# Altium PCB GC-Pcb.PcbDoc (part 3 of 3)
Units mm, origin at the board's own origin, x right, y up, seen from the top; angles counter-clockwise.
Board outline 75 x 40 mm, 4 copper layers (Top Copper, GND, PWR, Bottom Copper), stack 1.312 mm thick; 83 components, 62 nets, 306 pads, 137 vias.
Unrouted connection lines stored in the file: 2.
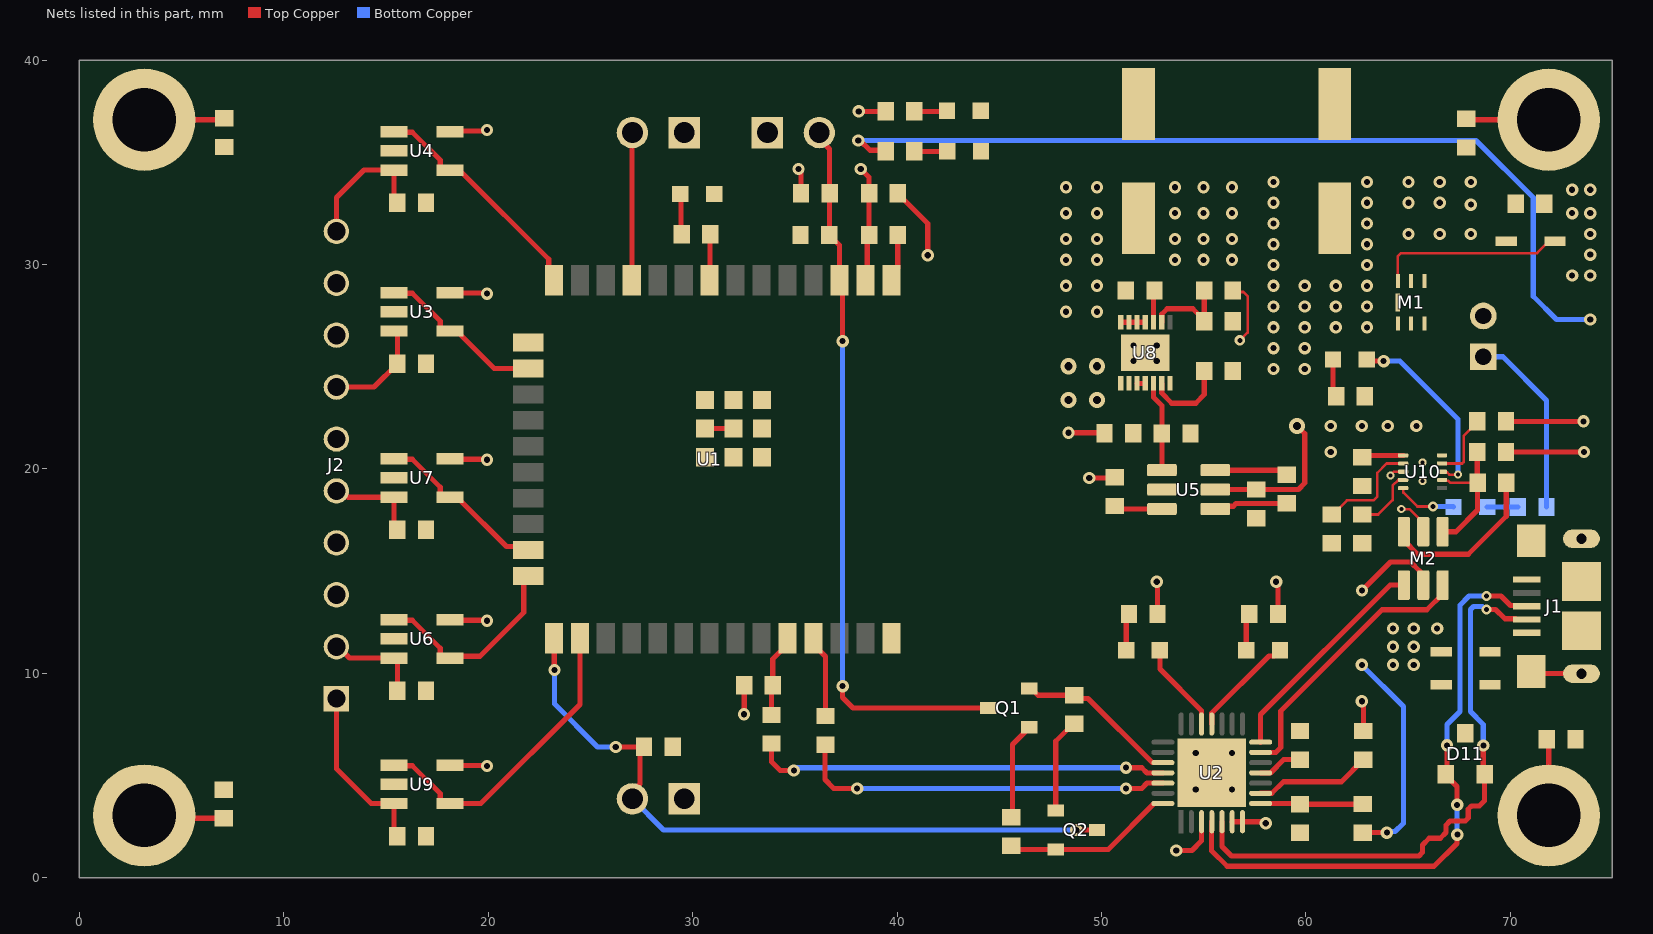
[diagram p4: the nets of this part, all layers, seen from the top]

## Part data (continued)
R10 R15 R16 R32: library part R-RC0603FR-071KL, "Fixed Resistor, Metal Glaze/thick Film, 0.1W, 1000ohm, 75V, 1% +/-Tol, 100ppm/Cel, Surface Mount, 0603", Manufacturer=Yageo, Max Operating Temperature=155°C, Min Operating Temperature=-55°C, Package Height=0.45mm, Package Length=1.6mm, Package Shape=Rectangular, Package Style=SMTMeter, Package Width=0.8mm, Rated Power Dissipation (P)=100mW, Rated Temperature=70°C, Resistance=1kR, Resistor Type="FIXED RESISTOR", Supplier Part Number 1=4016291, Temperature Coefficient=100ppm/°C, Tolerance=1%, Working Voltage=75V, Additional Feature="LASER TRIMMABLE", Category="Chip SMD Resistors", ComponentLink1description=https://datasheet.ciiva.com:443/pdfs/VipMasterIC/IC/YAGO/YAGO-S-A0008145938/YAGO-S-A0008145938-1.pdf?src-supplier=IHS+Markit, ComponentLink1URL=https://datasheet.ciiva.com:443/pdfs/VipMasterIC/IC/YAGO/YAGO-S-A0008145938/YAGO-S-A0008145938-1.pdf?src-supplier=IHS+Markit, ComponentLink2description=https://datasheet.ciiva.com/11808/0900766b80f96399-11808081.pdf?src-supplier=Rs, ComponentLink2URL=https://datasheet.ciiva.com/11808/0900766b80f96399-11808081.pdf?src-supplier=Rs, ComponentLink3Description=https://datasheet.ciiva.com/7746/1686128-7746280.pdf?src-supplier=Element14, ComponentLink3URL=https://datasheet.ciiva.com/7746/1686128-7746280.pdf?src-supplier=Element14, ComponentLink4Description=https://datasheet.ciiva.com/7660/1868787-7660790.pdf?src-supplier=Element14, ComponentLink4URL=https://datasheet.ciiva.com/7660/1868787-7660790.pdf?src-supplier=Element14, ComponentLink5Description=https://datasheet.ciiva.com/7983/443971-7983613.pdf?src-supplier=Element14, ComponentLink5URL=https://datasheet.ciiva.com/7983/443971-7983613.pdf?src-supplier=Element14, ComponentLink6Description=https://datasheet.ciiva.com/7746/1738695-7746281.pdf?src-supplier=Element14, ComponentLink6URL=https://datasheet.ciiva.com/7746/1738695-7746281.pdf?src-supplier=Element14, ComponentLink7Description=https://datasheet.ciiva.com/7746/1738695-7746279.pdf?src-supplier=Element14, ComponentLink7URL=https://datasheet.ciiva.com/7746/1738695-7746279.pdf?src-supplier=Element14, ComponentLink8Description=https://datasheet.ciiva.com/8896/pyu-rc0603-51-rohs-l-4-8896106.pdf?src-supplier=Avnet, ComponentLink8URL=https://datasheet.ciiva.com/8896/pyu-rc0603-51-rohs-l-4-8896106.pdf?src-supplier=Avnet, ComponentLink9Description=https://datasheet.ciiva.com/15189/getdatasheetpartid-404327-15189644.pdf?src-supplier=Verical, ComponentLink9URL=https://datasheet.ciiva.com/15189/getdatasheetpartid-404327-15189644.pdf?src-supplier=Verical, Construction=Chip, JESD-609 Code=e3, Manufacturer Part Number=RC0603FR-071KL, Mount="Surface Mount", Number of Pins=2, Packaging="Tape and Reel", Pricing="5000=0.0015, 75000=0.0015, 250000=0.0014, 750000=0.0013, 2500000=0.0012 (USD)", Reach SVHC Compliant=Yes, RoHS=Yes, RoHS Compliant=Yes, Size Code=0603, Stock=4965000, Supplier 1="Future Electronics", Technology="METAL GLAZE/THICK FILM", Terminal Finish=Nickel, Termination=Wraparound
R19 R20 R22 R23 R26 R28: library part R-RC0603FR-07100KL, "Fixed Resistor, Metal Glaze/thick Film, 0.1W, 100000ohm, 75V, 1% +/-Tol, 100ppm/Cel, Surface Mount, 0603", Manufacturer=Yageo, Max Operating Temperature=155°C, Min Operating Temperature=-55°C, Package Height=0.45mm, Package Length=1.6mm, Package Shape=Rectangular, Package Style=SMTMeter, Package Width=0.8mm, Rated Power Dissipation (P)=100mW, Rated Temperature=70°C, Resistance=100kR, Resistor Type="FIXED RESISTOR", Supplier Part Number 1=3697448, Temperature Coefficient=100ppm/°C, Tolerance=1%, Working Voltage=75V, Additional Feature="LASER TRIMMABLE", Category="Chip SMD Resistors", ComponentLink1description=https://datasheet.ciiva.com:443/pdfs/VipMasterIC/IC/YAGO/YAGO-S-A0008145938/YAGO-S-A0008145938-1.pdf?src-supplier=IHS+Markit, ComponentLink1URL=https://datasheet.ciiva.com:443/pdfs/VipMasterIC/IC/YAGO/YAGO-S-A0008145938/YAGO-S-A0008145938-1.pdf?src-supplier=IHS+Markit, ComponentLink2description=https://datasheet.ciiva.com/11808/0900766b80f96399-11808107.pdf?src-supplier=Rs, ComponentLink2URL=https://datasheet.ciiva.com/11808/0900766b80f96399-11808107.pdf?src-supplier=Rs, ComponentLink3Description=https://datasheet.ciiva.com/7983/443971-7983593.pdf?src-supplier=Element14, ComponentLink3URL=https://datasheet.ciiva.com/7983/443971-7983593.pdf?src-supplier=Element14, ComponentLink4Description=https://datasheet.ciiva.com/22747/443971-22747516.pdf?src-supplier=Element14, ComponentLink4URL=https://datasheet.ciiva.com/22747/443971-22747516.pdf?src-supplier=Element14, ComponentLink5Description=https://datasheet.ciiva.com/46440/1868787-46440889.pdf?src-supplier=Element14, ComponentLink5URL=https://datasheet.ciiva.com/46440/1868787-46440889.pdf?src-supplier=Element14, ComponentLink6Description=https://datasheet.ciiva.com/7746/1738695-7746235.pdf?src-supplier=Element14, ComponentLink6URL=https://datasheet.ciiva.com/7746/1738695-7746235.pdf?src-supplier=Element14, ComponentLink7Description=https://datasheet.ciiva.com/7746/1738695-7746234.pdf?src-supplier=Element14, ComponentLink7URL=https://datasheet.ciiva.com/7746/1738695-7746234.pdf?src-supplier=Element14, Construction=Chip, JESD-609 Code=e3, Manufacturer Part Number=RC0603FR-07100KL, Mount="Surface Mount", Number of Pins=2, Packaging="Tape and Reel", Pricing="5000=0.0015, 75000=0.0015, 250000=0.0014, 750000=0.0013, 2500000=0.0012 (USD)", Reach SVHC Compliant=Yes, RoHS=Yes, RoHS Compliant=Yes, Size Code=0603, Stock=10630000, Supplier 1="Future Electronics", Technology="METAL GLAZE/THICK FILM", Terminal Finish=Nickel, Termination=Wraparound
R25 R31: library part R-ERA-3AEB683V, "Fixed Resistor, Thin Film, 0.1W, 68000ohm, 75V, 0.1% +/-Tol, 25ppm/Cel, Surface Mount, 0603", Manufacturer=Panasonic, Max Operating Temperature=155°C, Min Operating Temperature=-55°C, Package Height=0.45mm, Package Length=1.6mm, Package Style=SMTMeter, Package Width=0.8mm, Rated Power Dissipation (P)=100mW, Rated Temperature=85°C, Resistance=68kR, Resistor Type="FIXED RESISTOR", Supplier Part Number 1=667-ERA-3AEB683V, Temperature Coefficient=25ppm/°C, Tolerance=0.1%, Working Voltage=75V, Category="Chip SMD Resistors", ComponentLink1description=https://datasheet.ciiva.com:443/pdfs/VipMasterIC/IC/PANA/PANA-S-A0009459258/PANA-S-A0009459258-1.pdf?src-supplier=IHS+Markit, ComponentLink1URL=https://datasheet.ciiva.com:443/pdfs/VipMasterIC/IC/PANA/PANA-S-A0009459258/PANA-S-A0009459258-1.pdf?src-supplier=IHS+Markit, ComponentLink2description=https://datasheet.ciiva.com/11808/0900766b80fe20f7-11808073.pdf?src-supplier=Rs, ComponentLink2URL=https://datasheet.ciiva.com/11808/0900766b80fe20f7-11808073.pdf?src-supplier=Rs, ComponentLink3Description=https://datasheet.ciiva.com/29183/451591-da-01-en-widerstand-0603-era-29183858.pdf?src-supplier=Conrad, ComponentLink3URL=https://datasheet.ciiva.com/29183/451591-da-01-en-widerstand-0603-era-29183858.pdf?src-supplier=Conrad, ComponentLink4Description=https://datasheet.ciiva.com/43455/485442-43455241.pdf?src-supplier=Farnell, ComponentLink4URL=https://datasheet.ciiva.com/43455/485442-43455241.pdf?src-supplier=Farnell, ComponentLink5Description=https://datasheet.ciiva.com/46443/485442-46443725.pdf?src-supplier=Element14, ComponentLink5URL=https://datasheet.ciiva.com/46443/485442-46443725.pdf?src-supplier=Element14, ComponentLink6Description=https://datasheet.ciiva.com/6138/485442-6138684.pdf?src-supplier=Farnell, ComponentLink6URL=https://datasheet.ciiva.com/6138/485442-6138684.pdf?src-supplier=Farnell, ComponentLink7Description=https://datasheet.ciiva.com/46443/485442-46443726.pdf?src-supplier=Element14, ComponentLink7URL=https://datasheet.ciiva.com/46443/485442-46443726.pdf?src-supplier=Element14, ComponentLink8Description=https://datasheet.ciiva.com/48530/era-eng-tds-48530367.pdf?src-supplier=Distrelec, ComponentLink8URL=https://datasheet.ciiva.com/48530/era-eng-tds-48530367.pdf?src-supplier=Distrelec, ComponentLink9Description=https://datasheet.ciiva.com/48425/era-eng-tds-48425487.pdf?src-supplier=Distrelec, ComponentLink9URL=https://datasheet.ciiva.com/48425/era-eng-tds-48425487.pdf?src-supplier=Distrelec, ComponentLink10Description=https://datasheet.ciiva.com/7886/485442-7886603.pdf?src-supplier=Element14, ComponentLink10URL=https://datasheet.ciiva.com/7886/485442-7886603.pdf?src-supplier=Element14, ComponentLink11Description=https://datasheet.ciiva.com/6138/485442-6138681.pdf?src-supplier=Farnell, ComponentLink11URL=https://datasheet.ciiva.com/6138/485442-6138681.pdf?src-supplier=Farnell, ComponentLink12Description=https://datasheet.ciiva.com/22739/485442-22739292.pdf?src-supplier=Element14, ComponentLink12URL=https://datasheet.ciiva.com/22739/485442-22739292.pdf?src-supplier=Element14, ComponentLink13Description=https://datasheet.ciiva.com/16770/70068849-16770412.pdf?src-supplier=Allied+Electronics, ComponentLink13URL=https://datasheet.ciiva.com/16770/70068849-16770412.pdf?src-supplier=Allied+Electronics, ComponentLink14Description=https://datasheet.ciiva.com/9117/aoa0000ce26-9117752.pdf?src-supplier=Avnet, ComponentLink14URL=https://datasheet.ciiva.com/9117/aoa0000ce26-9117752.pdf?src-supplier=Avnet, Construction=Rectangular, JESD-609 Code=e3, Manufacturer Part Number=ERA-3AEB683V, Mount="Surface Mount", Number of Pins=2, Packaging="Tape and Reel", Pricing="1=0.32, 10=0.139, 50=0.139, 100=0.062, 1000=0.043, 10000=0.034 (USD)", Reach SVHC Compliant=Yes, Reference Standard=AEC-Q200, RoHS=Yes, RoHS Compliant=Yes, Size Code=0603, Stock=13636, Supplier 1=Mouser, Technology="THIN FILM", Terminal Finish=Nickel, Termination=Wraparound
R27 R33: library part R-ERA-3AEB153V, "Fixed Resistor, Thin Film, 0.1W, 15000ohm, 75V, 0.1% +/-Tol, 25ppm/Cel, Surface Mount, 0603", Manufacturer=Panasonic, Max Operating Temperature=155°C, Min Operating Temperature=-55°C, Package Height=0.45mm, Package Length=1.6mm, Package Style=SMTMeter, Package Width=0.8mm, Rated Power Dissipation (P)=100mW, Rated Temperature=85°C, Resistance=15kR, Resistor Type="FIXED RESISTOR", Supplier Part Number 1=667-ERA-3AEB153V, Temperature Coefficient=25ppm/°C, Tolerance=0.1%, Working Voltage=75V, Category="Chip SMD Resistors", ComponentLink1description=https://datasheet.ciiva.com:443/pdfs/VipMasterIC/IC/PANA/PANA-S-A0009459258/PANA-S-A0009459258-1.pdf?src-supplier=IHS+Markit, ComponentLink1URL=https://datasheet.ciiva.com:443/pdfs/VipMasterIC/IC/PANA/PANA-S-A0009459258/PANA-S-A0009459258-1.pdf?src-supplier=IHS+Markit, ComponentLink2description=https://datasheet.ciiva.com/11808/0900766b80fe20f7-11808023.pdf?src-supplier=Rs, ComponentLink2URL=https://datasheet.ciiva.com/11808/0900766b80fe20f7-11808023.pdf?src-supplier=Rs, ComponentLink3Description=https://datasheet.ciiva.com/29183/451305-da-01-en-widerstand-0603-era-29183818.pdf?src-supplier=Conrad, ComponentLink3URL=https://datasheet.ciiva.com/29183/451305-da-01-en-widerstand-0603-era-29183818.pdf?src-supplier=Conrad, ComponentLink4Description=https://datasheet.ciiva.com/46422/485442-46422566.pdf?src-supplier=Element14, ComponentLink4URL=https://datasheet.ciiva.com/46422/485442-46422566.pdf?src-supplier=Element14, ComponentLink5Description=https://datasheet.ciiva.com/6000/485442-6000508.pdf?src-supplier=Farnell, ComponentLink5URL=https://datasheet.ciiva.com/6000/485442-6000508.pdf?src-supplier=Farnell, ComponentLink6Description=https://datasheet.ciiva.com/46422/485442-46422567.pdf?src-supplier=Element14, ComponentLink6URL=https://datasheet.ciiva.com/46422/485442-46422567.pdf?src-supplier=Element14, ComponentLink7Description=https://datasheet.ciiva.com/5734/485442-5734541.pdf?src-supplier=Farnell, ComponentLink7URL=https://datasheet.ciiva.com/5734/485442-5734541.pdf?src-supplier=Farnell, ComponentLink8Description=https://datasheet.ciiva.com/28681/485442-28681528.pdf?src-supplier=Element14, ComponentLink8URL=https://datasheet.ciiva.com/28681/485442-28681528.pdf?src-supplier=Element14, ComponentLink9Description=https://datasheet.ciiva.com/16764/70068849-16764126.pdf?src-supplier=Allied+Electronics, ComponentLink9URL=https://datasheet.ciiva.com/16764/70068849-16764126.pdf?src-supplier=Allied+Electronics, ComponentLink10Description=https://datasheet.ciiva.com/9193/aoa0000ce26-9193070.pdf?src-supplier=Avnet, ComponentLink10URL=https://datasheet.ciiva.com/9193/aoa0000ce26-9193070.pdf?src-supplier=Avnet, Construction=Rectangular, JESD-609 Code=e3, Manufacturer Part Number=ERA-3AEB153V, Mount="Surface Mount", Number of Pins=2, Packaging="Tape and Reel", Pricing="1=0.31, 10=0.139, 50=0.139, 100=0.062, 1000=0.043, 10000=0.038 (USD)", Reach SVHC Compliant=Yes, Reference Standard=AEC-Q200, RoHS=Yes, RoHS Compliant=Yes, Size Code=0603, Stock=131542, Supplier 1=Mouser, Technology="THIN FILM", Terminal Finish=Nickel, Termination=Wraparound
R30: library part R-ERJ-3EKF5600V, "Fixed Resistor, Metal Glaze/thick Film, 0.1W, 560ohm, 75V, 1% +/-Tol, 100ppm/Cel, Surface Mount, 0603", Manufacturer=Panasonic, Max Operating Temperature=155°C, Min Operating Temperature=-55°C, Package Height=0.45mm, Package Length=1.6mm, Package Shape=Rectangular, Package Style=SMTMeter, Package Width=0.8mm, Rated Power Dissipation (P)=100mW, Rated Temperature=70°C, Resistance=560R, Resistor Type="FIXED RESISTOR", Supplier Part Number 1=667-ERJ-3EKF5600V, Temperature Coefficient=100ppm/°C, Tolerance=1%, Working Voltage=75V, Category="Chip SMD Resistors", ComponentLink1description=https://datasheet.ciiva.com:443/pdfs/VipMasterIC/IC/PANA/PANA-S-A0009889626/PANA-S-A0009889626-1.pdf?src-supplier=IHS+Markit, ComponentLink1URL=https://datasheet.ciiva.com:443/pdfs/VipMasterIC/IC/PANA/PANA-S-A0009889626/PANA-S-A0009889626-1.pdf?src-supplier=IHS+Markit, ComponentLink2description=https://datasheet.ciiva.com/3883/3984280s8821682n1386-3883650.pdf?src-supplier=Arrow+Electronics, ComponentLink2URL=https://datasheet.ciiva.com/3883/3984280s8821682n1386-3883650.pdf?src-supplier=Arrow+Electronics, ComponentLink3Description=https://datasheet.ciiva.com/5860/aoa0000ce2-5860665.pdf?src-supplier=Farnell, ComponentLink3URL=https://datasheet.ciiva.com/5860/aoa0000ce2-5860665.pdf?src-supplier=Farnell, ComponentLink4Description=https://datasheet.ciiva.com/7909/aoa0000ce2-7909198.pdf?src-supplier=Element14, ComponentLink4URL=https://datasheet.ciiva.com/7909/aoa0000ce2-7909198.pdf?src-supplier=Element14, ComponentLink5Description=https://datasheet.ciiva.com/46381/1678782-46381547.pdf?src-supplier=Element14, ComponentLink5URL=https://datasheet.ciiva.com/46381/1678782-46381547.pdf?src-supplier=Element14, ComponentLink6Description=https://datasheet.ciiva.com/22674/1678782-22674427.pdf?src-supplier=Element14, ComponentLink6URL=https://datasheet.ciiva.com/22674/1678782-22674427.pdf?src-supplier=Element14, ComponentLink7Description=https://datasheet.ciiva.com/22737/426256-22737578.pdf?src-supplier=Element14, ComponentLink7URL=https://datasheet.ciiva.com/22737/426256-22737578.pdf?src-supplier=Element14, ComponentLink8Description=https://datasheet.ciiva.com/28590/1678782-28590766.pdf?src-supplier=Element14, ComponentLink8URL=https://datasheet.ciiva.com/28590/1678782-28590766.pdf?src-supplier=Element14, ComponentLink9Description=https://datasheet.ciiva.com/46381/1678782-46381548.pdf?src-supplier=Element14, ComponentLink9URL=https://datasheet.ciiva.com/46381/1678782-46381548.pdf?src-supplier=Element14, ComponentLink10Description=https://datasheet.ciiva.com/24124/aoa0000ce2-24124277.pdf?src-supplier=Mouser, ComponentLink10URL=https://datasheet.ciiva.com/24124/aoa0000ce2-24124277.pdf?src-supplier=Mouser, ComponentLink11Description=https://datasheet.ciiva.com/16763/70260748-16763150.pdf?src-supplier=Allied+Electronics, ComponentLink11URL=https://datasheet.ciiva.com/16763/70260748-16763150.pdf?src-supplier=Allied+Electronics, ComponentLink12Description=https://datasheet.ciiva.com/16781/70260748-16781128.pdf?src-supplier=Allied+Electronics, ComponentLink12URL=https://datasheet.ciiva.com/16781/70260748-16781128.pdf?src-supplier=Allied+Electronics, ComponentLink13Description=https://datasheet.ciiva.com/9117/aoa0000ce2-9117192.pdf?src-supplier=Avnet, ComponentLink13URL=https://datasheet.ciiva.com/9117/aoa0000ce2-9117192.pdf?src-supplier=Avnet, Construction=Rectangular, JESD-609 Code=e3, Manufacturer Part Number=ERJ-3EKF5600V, Mount="Surface Mount", Number of Pins=2, Packaging="Tape and Reel", Pricing="1=0.1, 10=0.024, 50=0.024, 100=0.011, 1000=0.008, 10000=0.005 (USD)", Reach SVHC Compliant=Yes, Reference Standard=AEC-Q200, RoHS=Yes, RoHS Compliant=Yes, Size Code=0603, Stock=63183, Supplier 1=Mouser, Technology="METAL GLAZE/THICK FILM", Terminal Finish=Nickel, Termination=Wraparound
U1: "Rx Txrx Mod Wifi Trace Ant SMD", Manufacturer="Espressif Systems", Supplier Part Number 1=1965-ESP32-WROOM-32E-H4CT-ND, Category=Uncategorized, Manufacturer Part Number=ESP32-WROOM-32E-H4, Pricing="1=2.68 (USD)", RoHS=No, Stock=877, Supplier 1=Digikey
U2: library part U-CP2102N-A02-GQFN28, "USB Bus Controller, CMOS", Manufacturer="Silicon Labs", Supplier Part Number 1=336-5889-ND, Category="USB Interface ICs", ComponentLink1description=https://datasheet.ciiva.com:443/pdfs/VipMasterIC/IC/SILC/SILC-S-A0007770867/SILC-S-A0007770867-1.pdf?src-supplier=IHS+Markit, ComponentLink1URL=https://datasheet.ciiva.com:443/pdfs/VipMasterIC/IC/SILC/SILC-S-A0007770867/SILC-S-A0007770867-1.pdf?src-supplier=IHS+Markit, ComponentLink2description=https://4donline.ihs.com/images/VipMasterIC/IC/SILC/SILC-S-A0007770867/SILC-S-A0007770867-1.pdf?hkey=6D3A4C79FDBF58556ACFDE234799DDF0&src-supplier=Newark, ComponentLink2URL=https://4donline.ihs.com/images/VipMasterIC/IC/SILC/SILC-S-A0007770867/SILC-S-A0007770867-1.pdf?hkey=6D3A4C79FDBF58556ACFDE234799DDF0&src-supplier=Newark, ComponentLink3Description=https://4donline.ihs.com/images/VipMasterIC/IC/SILC/SILC-S-A0007770867/SILC-S-A0007770867-1.pdf?hkey=6D3A4C79FDBF58556ACFDE234799DDF0&src-supplier=Farnell, ComponentLink3URL=https://4donline.ihs.com/images/VipMasterIC/IC/SILC/SILC-S-A0007770867/SILC-S-A0007770867-1.pdf?hkey=6D3A4C79FDBF58556ACFDE234799DDF0&src-supplier=Farnell, Manufacturer Part Number=CP2102N-A02-GQFN28, Pricing="1=4.66, 10=4.183, 73=3.95411, 146=3.42692, 292=3.2512, 511=2.91728, 1022=2.46036, 2555=2.33734 (USD)", RoHS=Yes, Stock=1881, Supplier 1=Digikey
U3 U4 U6 U7 U9: library part U-MCP6071T-E/OT, "Operational Amplifier, 1 Func, 150uV Offset-Max, CMOS, PDSO5", Average Bias Current-Max (IIB)=5nA, Bias Current-Max (IIB) @25C=100pA, Frequency Compensation=YES, Input Offset Voltage-Max=150uV, Manufacturer=Microchip, Max Operating Temperature=125°C, Max Supply Current=170uA, Micropower=Yes, Min Operating Temperature=-40°C, Package Body Material=Plastic, Package Code=LSSOP, Package Equivalence Code=TSOP5/6,.11,37, Package Shape=Rectangular, Package Style="SMALL OUTLINE, LOW PROFILE, SHRINK PITCHMeter", Peak Reflow Temperature (Cel)=260°C, Power=No, Power Supplies=2.5V, Supplier Part Number 1=23T2818, Supply Voltage Limit-Max=7V, Supply Voltage-Nom (Vsup)=3V, Temperature Grade=AUTOMOTIVE, Time @ Peak Reflow Temperature-Max (s)=40s, Voltage Gain-Min=56200, Amplifier Type="OPERATIONAL AMPLIFIER", Architecture=VOLTAGE-FEEDBACK, Category="Amplifiers - Op Amps, Buffer, Instrumentation", Common-mode Reject Ratio-Nom=91dB, ComponentLink1description=https://datasheet.ciiva.com:443/pdfs/VipMasterIC/IC/MCHP/MCHPS03324/MCHPS03324-1.pdf?src-supplier=IHS+Markit, ComponentLink1URL=https://datasheet.ciiva.com:443/pdfs/VipMasterIC/IC/MCHP/MCHPS03324/MCHPS03324-1.pdf?src-supplier=IHS+Markit, ComponentLink2description=https://datasheet.ciiva.com/4761/22142-b-mcp6071-52533-4761074.pdf?src-supplier=Mouser, ComponentLink2URL=https://datasheet.ciiva.com/4761/22142-b-mcp6071-52533-4761074.pdf?src-supplier=Mouser, ComponentLink3Description=https://datasheet.ciiva.com/8078/387987-8078837.pdf?src-supplier=Element14, ComponentLink3URL=https://datasheet.ciiva.com/8078/387987-8078837.pdf?src-supplier=Element14, ComponentLink4Description=https://datasheet.ciiva.com/1793/22142-b-mcp6071-1793444.pdf?src-supplier=Digikey, ComponentLink4URL=https://datasheet.ciiva.com/1793/22142-b-mcp6071-1793444.pdf?src-supplier=Digikey, ComponentLink5Description=https://datasheet.ciiva.com/1793/22142-b-mcp6071-1793445.pdf?src-supplier=Digikey, ComponentLink5URL=https://datasheet.ciiva.com/1793/22142-b-mcp6071-1793445.pdf?src-supplier=Digikey, ComponentLink6Description=https://datasheet.ciiva.com/1793/22142-b-mcp6071-1793446.pdf?src-supplier=Digikey, ComponentLink6URL=https://datasheet.ciiva.com/1793/22142-b-mcp6071-1793446.pdf?src-supplier=Digikey, ComponentLink7Description=https://datasheet.ciiva.com/16426/filehandler-aspxddocname-en540513-16426686.pdf?src-supplier=Future+Electronics, ComponentLink7URL=https://datasheet.ciiva.com/16426/filehandler-aspxddocname-en540513-16426686.pdf?src-supplier=Future+Electronics, ComponentLink8Description=https://datasheet.ciiva.com/26937/getdatasheetpartid-770193-26937739.pdf?src-supplier=Verical, ComponentLink8URL=https://datasheet.ciiva.com/26937/getdatasheetpartid-770193-26937739.pdf?src-supplier=Verical, ComponentLink9Description=https://datasheet.ciiva.com/22711/387987-22711943.pdf?src-supplier=Element14, ComponentLink9URL=https://datasheet.ciiva.com/22711/387987-22711943.pdf?src-supplier=Element14, ComponentLink10Description=https://datasheet.ciiva.com/28630/1062688-28630617.pdf?src-supplier=Element14, ComponentLink10URL=https://datasheet.ciiva.com/28630/1062688-28630617.pdf?src-supplier=Element14, ComponentLink11Description=https://datasheet.ciiva.com/14545/70048096-14545063.pdf?src-supplier=Allied+Electronics, ComponentLink11URL=https://datasheet.ciiva.com/14545/70048096-14545063.pdf?src-supplier=Allied+Electronics, ComponentLink12Description=https://datasheet.ciiva.com/41459/001084911-da-01-en-ic-opamp-r-r-mcp6071t-e-ot-sot-23-5-mcp-41459147.pdf?src-supplier=Conrad, ComponentLink12URL=https://datasheet.ciiva.com/41459/001084911-da-01-en-ic-opamp-r-r-mcp6071t-e-ot-sot-23-5-mcp-41459147.pdf?src-supplier=Conrad, Height - Seated (Max)=1.45mm, JESD-30 Code=R-PDSO-G5, JESD-609 Code=e3, Length=2.9mm, Low-Bias=Yes, Low-Offset=Yes, Manufacturer Part Number=MCP6071T-E/OT, Moisture Sensitivity Level=1, Number of Functions=1, Number of Pins=5, Packaging="Tape and Reel", Pricing="1=0.648 (USD)", Programmable Power=No, Qualification Status="Not Qualified", Reach SVHC Compliant=Yes, RoHS=Yes, RoHS Compliant=Yes, Slew Rate=0.5V/µs, Stock=6, Supplier 1=Avnet, Surface Mount=Yes, Technology=CMOS, Terminal Finish=Tin, Terminal Form="Gull Wing", Terminal Pitch=0.95mm, Terminal Position=DUAL, Unity Gain BW-Nom=1.2MHz, Wideband=No, Width=1.55mm
U5: library part U-REG71050DDC, "Switched Capacitor Converter, 0.06A, 1000kHz Switching Freq-Max, PDSO6", Manufacturer="Texas Instruments", Max Input Voltage=5.5V, Max Operating Temperature=85°C, Min Input Voltage=2.7V, Min Operating Temperature=-40°C, Nominal Input Voltage=3.25V, Nominal Output Voltage=5V, Package Body Material=Plastic, Package Code=TSSOP, Package Equivalence Code=TSOP6,.11,37, Package Shape=Rectangular, Package Style="SMALL OUTLINE, THIN PROFILE, SHRINK PITCHMeter", Peak Reflow Temperature (Cel)=260°C, Supplier Part Number 1=595-REG71050DDCT, Switching Frequency-Max=1MHz, Temperature Grade=INDUSTRIAL, Analog IC - Other Type="SWITCHED CAPACITOR CONVERTER", Category="Voltage Regulators - Switching", ComponentLink1description=https://www.ti.com:443/lit/ds/symlink/reg710-25.pdf?src-supplier=IHS+Markit, ComponentLink1URL=https://www.ti.com:443/lit/ds/symlink/reg710-25.pdf?src-supplier=IHS+Markit, ComponentLink2description=https://datasheet.ciiva.com/22669/1716593-22669509.pdf?src-supplier=Element14, ComponentLink2URL=https://datasheet.ciiva.com/22669/1716593-22669509.pdf?src-supplier=Element14, ComponentLink3Description=https://datasheet.ciiva.com/15114/getdatasheetpartid-294612-15114101.pdf?src-supplier=Verical, ComponentLink3URL=https://datasheet.ciiva.com/15114/getdatasheetpartid-294612-15114101.pdf?src-supplier=Verical, ComponentLink4Description=https://datasheet.ciiva.com/41462/001014487-da-01-en-ic-reg-multi-c-reg71050ddct-sot-23-6-tid-41462341.pdf?src-supplier=Conrad, ComponentLink4URL=https://datasheet.ciiva.com/41462/001014487-da-01-en-ic-reg-multi-c-reg71050ddct-sot-23-6-tid-41462341.pdf?src-supplier=Conrad, ComponentLink5Description=https://datasheet.ciiva.com/2029/reg71050-2029349.pdf?src-supplier=Digikey, ComponentLink5URL=https://datasheet.ciiva.com/2029/reg71050-2029349.pdf?src-supplier=Digikey, ComponentLink6Description=https://datasheet.ciiva.com/2029/reg71050-2029348.pdf?src-supplier=Digikey, ComponentLink6URL=https://datasheet.ciiva.com/2029/reg71050-2029348.pdf?src-supplier=Digikey, ComponentLink7Description=https://datasheet.ciiva.com/2029/reg71050-2029350.pdf?src-supplier=Digikey, ComponentLink7URL=https://datasheet.ciiva.com/2029/reg71050-2029350.pdf?src-supplier=Digikey, ComponentLink8Description=https://datasheet.ciiva.com/3216/reg71050-3216238.pdf?src-supplier=Avnet, ComponentLink8URL=https://datasheet.ciiva.com/3216/reg71050-3216238.pdf?src-supplier=Avnet, Height - Seated (Max)=1.1mm, JESD-30 Code=R-PDSO-G6, JESD-609 Code=e4, Length=2.9mm, Manufacturer Part Number=REG71050DDCT, Moisture Sensitivity Level=1, Number of Functions=1, Number of Pins=6, Pricing="1=1.6, 10=1.39, 50=1.39, 100=1.16, 1000=0.805, 10000=0.694 (USD)", Qualification Status="Not Qualified", Reach SVHC Compliant=Yes, RoHS=Yes, RoHS Compliant=Yes, Stock=228, Supplier 1=Mouser, Surface Mount=Yes, Switcher Configuration="DOUBLER INVERTER", Terminal Finish=Nickel, Terminal Form="Gull Wing", Terminal Pitch=0.95mm, Terminal Position=DUAL, Width=1.6mm
U8: library part U-MAX38909ATD+, "IC Reg Lin Pos Prog 4A 14TDFN", Manufacturer="Analog Devices", Supplier Part Number 1=700-MAX38909ATD+, Manufacturer Part Number=MAX38909ATD+, Pricing="1=5.13, 10=3.89, 50=3.89, 100=3.69, 1000=3.05, 10000=3.05 (USD)", RoHS=No, Stock=2276, Supplier 1=Mouser
U10: library part U-BQ24045DSQR, "Power Supply Support Circuit, Adjustable, 1 Channel, 6.65, PDSO10", Manufacturer="Texas Instruments", Package Body Material=Plastic, Package Code=HVSON, Package Shape=Square, Package Style="SMALL OUTLINE, HEAT SINK/SLUG, VERY THIN PROFILEMeter", Peak Reflow Temperature (Cel)=260°C, Power Supplies=5V, Supplier Part Number 1=595-BQ24045DSQR, Supply Current-Max (Isup)=1A, Supply Voltage-Max (Vsup)=28V, Supply Voltage-Min (Vsup)=3.5V, Adjustable Threshold=Yes, Analog IC - Other Type="POWER SUPPLY SUPPORT CIRCUIT", Category="Battery Management", ComponentLink1description=https://www.ti.com:443/lit/ds/symlink/bq24040.pdf?src-supplier=IHS+Markit, ComponentLink1URL=https://www.ti.com:443/lit/ds/symlink/bq24040.pdf?src-supplier=IHS+Markit, ComponentLink2description=https://datasheet.ciiva.com/15367/slus941e-317338-15367177.pdf?src-supplier=Mouser, ComponentLink2URL=https://datasheet.ciiva.com/15367/slus941e-317338-15367177.pdf?src-supplier=Mouser, ComponentLink3Description=https://datasheet.ciiva.com/15047/bq24045-15047702.pdf?src-supplier=Digikey, ComponentLink3URL=https://datasheet.ciiva.com/15047/bq24045-15047702.pdf?src-supplier=Digikey, Height - Seated (Max)=0.8mm, JESD-30 Code=S-PDSO-N10, JESD-609 Code=e4, Length=2mm, Manufacturer Part Number=BQ24045DSQR, Moisture Sensitivity Level=2, Number of Channels=1, Number of Functions=1, Number of Pins=10, Pricing="1=1.05, 10=0.926, 50=0.926, 100=0.768, 1000=0.563, 10000=0.452 (USD)", Qualification Status="Not Qualified", Reach SVHC Compliant=Yes, RoHS=Yes, RoHS Compliant=Yes, Stock=6811, Supplier 1=Mouser, Supply Voltage-Nom (Vsup)=5V, Surface Mount=Yes, Terminal Finish=Nickel, Terminal Form="No Lead", Terminal Pitch=0.4mm, Terminal Position=DUAL, Width=2mm

## Via types
v1: diameter 0.6, hole 0.3, Top Copper to Bottom Copper, tented both sides, 125 vias
v2: diameter 0.8, hole 0.4, Top Copper to Bottom Copper, tented both sides, 5 vias
v3: diameter 0.5, hole 0.25, Top Copper to Bottom Copper, tented both sides, 4 vias
v4: diameter 0.4, hole 0.2, Top Copper to Bottom Copper, tented both sides, 3 vias

## Nets (pads, with @x,y where several pads share a name; then routed paths per layer and width w, separated by ;. In a path a pad name is that pad's centre, name@x,y a point inside that pad or via, vN(x,y) a via of type N, cw(c..) or ccw(c..) an arc to the next point about the centre after c; other vN are vias at no path point)
+3V3: C1.2 C2.1 C9.2 C11.1 J2.3 J2.4 J2.6 J2.8 J2.9 R1.1 R6.1 R9.2 R10.1 R12.1 R13.1 R25.2 U1.2 U2.6 U2.7 U3.5 U4.5 U6.5 U7.5 U8.11 U8.12 U8.13 U8.14 U9.5 | length 26.4
  Top Copper w0.254: U9.5@18.136,5.512 18.161,5.486 19.914,5.486 v1(19.939,5.461) ; U6.5@18.136,12.624 18.161,12.598 19.914,12.598 v1(19.939,12.573) ; U7.5@18.136,20.498 18.161,20.472 19.914,20.472 v1(19.939,20.447) ; U3.5@18.136,28.626 18.161,28.6 19.914,28.6 v1(19.939,28.575) ; U4.5@18.136,36.5 18.174,36.538 19.901,36.538 v1(19.939,36.576) ; v1(32.512,8.001) 32.523,8.012 R9.2@32.523,9.423 ; v1(35.179,34.671) 35.303,34.547 R1.1@35.303,33.477 ; v1@38.1,37.465 v1(38.125,37.49) R6.1@39.446,37.49 ; v1(38.227,34.671) 38.633,34.265 C2.1@38.633,33.477 C1.2@38.633,31.445 38.543,31.355 38.543,29.313 U1.2@38.453,29.223 ; U8.14@50.946,27.178 U8.13@51.346,27.178 U8.12@51.746,27.178 U8.11@52.146,27.178 ; v1(52.705,14.478) 52.745,14.438 R12.1@52.745,12.903 ; U2.6@56.397,2.74 U2.7@56.897,2.74 57.966,2.74 v1(58.039,2.667) ; v1(58.547,14.478) 58.637,14.388 R13.1@58.637,12.903 ; v1(62.738,8.636) 62.814,8.56 R10.1@62.814,7.177
  other v1: 48.26,27.686 49.784,27.686 48.26,28.956 49.784,28.956 48.26,30.226 49.784,30.226 53.594,30.226 54.991,30.226 56.388,30.226 48.26,31.242 49.784,31.242 53.594,31.242 54.991,31.242 56.388,31.242 48.26,32.512 49.784,32.512 53.594,32.512 54.991,32.512 56.388,32.512 48.26,33.782 49.784,33.782 53.594,33.782 54.991,33.782 56.388,33.782
+5V: C13.2 D1.C D10.A M1.3 R3.1 R5.1 R26.2 R29.2 R31.2 U10.1 | length 73.5
  Top Copper w0.127: M1.3@64.501,29.185 64.501,30.407 64.65,30.556 71.309,30.556 71.893,31.14 D10.A@72.183,31.14
  Top Copper w0.254: v1(38.1,36.068) 38.194,36.068 38.677,35.585 39.396,35.585 R5.1@39.446,35.535 ; C13.2@62.763,20.563 62.863,20.663 U10.1@64.76,20.663 ; R3.1@62.789,2.207 v1(63.96,2.207) ; R31.2@69.788,20.828 v1(73.609,20.828) ; R29.2@69.788,22.327 v1(73.584,22.327)
  Bottom Copper w0.254: v1(38.1,36.068) 68.326,36.068 71.12,33.274 71.12,28.448 72.263,27.305 v1(73.914,27.305) ; v1(62.738,10.414) 64.77,8.382 64.77,2.667 64.363,2.26 64.013,2.26 v1(63.96,2.207)
  other v1: 64.262,10.414 65.278,10.414 64.262,11.303 65.278,11.303 64.262,12.192 65.278,12.192 66.421,12.192 61.214,20.828 61.214,22.098 62.738,22.098 64.008,22.098 65.405,22.098 73.025,29.464 73.914,29.464 73.914,30.48 73.914,31.496 73.025,32.512 73.914,32.512 73.025,33.655 73.914,33.655
+VBAT: J3.1 M1.1 M1.2 M1.5 M1.6 R15.1 R16.1 U10.10 | length 9.2
  Bottom Copper w0.254: J3.1@68.682,25.483 69.64,25.483 71.769,23.354 R16.1@71.769,18.136
/Suspend: R17.2 U2.11 | length 2.2
  Top Copper w0.254: U2.11@57.788,5.131 58.268,5.131 58.914,5.777 R17.2@59.715,5.777
Boot: BOOT.2 C3.1 Q2.3 U1.25 | length 34.7
  Top Copper w0.254: U1.25@23.213,11.722 23.227,11.708 23.227,10.174 v1(23.241,10.16) ; v1(26.238,6.401) C3.1@27.621,6.401 27.432,6.212 27.432,4.587 27.051,4.206 BOOT.2@27.051,3.861 ; v1(48.768,2.337) Q2.3@49.784,2.337
  Bottom Copper w0.254: v1(23.241,10.16) 23.241,8.509 25.349,6.401 v1(26.238,6.401) ; BOOT.2@27.051,3.861 28.575,2.337 v1(48.768,2.337) v1@48.743,2.312
CAL: CAL.2 U1.11 | length 7.2
  Top Copper w0.254: U1.11@27.023,29.223 27.037,29.237 27.037,36.435 CAL.2@27.051,36.449
CHR_FLT: M2.3 U2.13 | length 13.6
  Top Copper w0.254: U2.13@57.788,6.131 58.531,6.131 58.776,6.375 58.776,8.153 63.729,13.106 65.914,13.106 66.693,13.886 M2.3@66.693,14.316
CHR_IND: CHRG.C U10.8 | length 9.2
  Top Copper w0.127: U10.8@66.66,19.863 66.696,19.826 66.915,19.826 67.021,19.72 v4(67.437,19.72)
  Top Copper w0.254: CHRG.C@62.979,25.349 63.055,25.273 v1(63.805,25.273)
  Bottom Copper w0.254: v1(63.805,25.273) 64.592,25.273 67.437,22.428 v4(67.437,19.72)
CHR_LOW: M2.1 U2.14 | length 11
  Top Copper w0.254: U2.14@57.788,6.631 57.788,7.979 64.125,14.316 M2.1@64.793,14.316
CHR_PG: D9.C U10.5 | length 3
  Top Copper w0.127: U10.5@64.76,19.063 64.77,19.052 64.77,18.847 65.456,18.161 v3(66.218,18.161)
  Bottom Copper w0.254: v3(66.218,18.161) 67.196,18.161 D9.C@67.222,18.136
DTR: Q2.2 R14.1 U2.28 | length 8.4
  Top Copper w0.254: R14.1@45.593,1.561 45.767,1.387 50.33,1.387 52.574,3.631 U2.28@53.007,3.631
EN: C5.2 ENA.2 Q1.3 R1.2 U1.3 | length 35.5
  Top Copper w0.254: ENA.2@36.195,36.449 36.195,36.159 36.703,35.651 R1.2@36.703,33.477 36.69,33.465 36.69,31.458 C5.2@36.678,31.445 36.678,31.395 36.887,31.186 36.937,31.186 37.183,30.94 U1.3@37.183,29.223 37.338,29.068 v1(37.338,26.251) ; v1(37.338,9.373) 37.338,8.814 37.846,8.306 Q1.3@44.456,8.306
  Bottom Copper w0.254: v1(37.338,9.373) v1(37.338,26.251)
FSO1: U1.14 U4.1 U4.4 | length 11.5
  Top Copper w0.254: U4.1@15.392,36.5 15.421,36.471 16.285,36.471 17.65,35.106 17.65,34.773 17.803,34.62 U4.4@18.136,34.62 18.224,34.531 18.682,34.531 22.959,30.254 22.959,29.477 U1.14@23.213,29.223
FSO1_R: J2.10 R20.2 U4.3 | length 6.7
  Top Copper w0.254: J2.10@12.573,31.623 12.573,33.274 13.919,34.62 U4.3@15.392,34.62 15.392,33.184 R20.2@15.556,33.02
FSO2: U1.16 U3.1 U3.4 | length 8.3
  Top Copper w0.254: U3.1@15.392,28.626 15.421,28.597 16.285,28.597 17.65,27.232 17.65,26.899 17.803,26.746 18.517,26.746 18.605,26.657 18.605,26.607 20.295,24.917 U1.16@21.962,24.917
FSO2_R: J2.7 R19.2 U3.3 | length 5.1
  Top Copper w0.254: J2.7@12.573,24.003 14.413,24.003 R19.2@15.556,25.146 15.556,26.594 15.404,26.746 U3.3@15.392,26.746
FSO3: U1.23 U7.1 U7.4 | length 8.6
  Top Copper w0.254: U7.1@15.392,20.498 15.421,20.469 16.285,20.469 17.65,19.104 17.65,18.771 17.803,18.618 18.517,18.618 18.605,18.529 18.605,18.484 20.892,16.198 21.792,16.198 U1.23@21.962,16.027
FSO3_R: J2.5 R23.2 U7.3 | length 4.6
  Top Copper w0.254: J2.5@12.573,18.923 12.84,18.923 13.145,18.618 U7.3@15.392,18.618 15.392,17.182 R23.2@15.556,17.018
FSO4: U1.24 U6.1 U6.4 | length 10.1
  Top Copper w0.254: U6.1@15.392,12.624 15.421,12.595 16.285,12.595 17.65,11.23 17.65,10.897 17.803,10.744 U6.4@18.136,10.744 18.224,10.833 19.596,10.833 21.737,12.974 21.737,14.532 U1.24@21.962,14.757
FSO4_R: J2.2 R22.2 U6.3 | length 4.7
  Top Copper w0.254: J2.2@12.573,11.303 12.656,11.303 13.215,10.744 U6.3@15.392,10.744 15.404,10.744 15.556,10.592 R22.2@15.556,9.144
FSO5: U1.26 U9.1 U9.4 | length 15.3
  Top Copper w0.254: U9.1@15.392,5.512 15.421,5.483 16.285,5.483 17.65,4.118 17.65,3.785 17.803,3.632 U9.4@18.136,3.632 19.634,3.632 24.483,8.481 U1.26@24.483,11.722
FSO5_R: J2.1 R28.2 U9.3 | length 8.6
  Top Copper w0.254: J2.1@12.573,8.763 12.573,5.334 14.275,3.632 U9.3@15.392,3.632 15.392,2.196 R28.2@15.556,2.032
GND: BOOT.1 C1.1 C2.2 C3.2 C5.1 C6.1 C8.1 C10.2 C11.2 C12.1 C13.1 CAL.1 D2.C D3.A D4.C D5.C D11.3 ENA.1 J1.5 J1.S1 J1.S2 J1.S3 J1.S4 J1.S5 J1.S6 J3.2 M2.2 M2.5 R7.1 R17.1 R19.1 R20.1 R22.1 R23.1 R26.1 R27.1 R28.1 R30.1 R32.1 R34.1 R35.1 R36.1 R37.1 U1.1 U1.15 U1.38 U1.39 U1.40 U1.41 U1.42 U1.43 U1.44 U1.45 U1.46 U1.47 U2.3 U2.29 U3.2 U4.2 U5.2 U6.2 U7.2 U8.7 U8.15 U9.2 U10.3 U10.11 U10.12 U10.13 | length 24
  Top Copper w0.127: R27.1@56.428,28.727 56.501,28.654 56.944,28.654 57.15,28.448 57.15,26.67 v3(56.769,26.289) ; v4(64.135,19.685) 64.313,19.863 U10.3@64.76,19.863 ; v4(64.668,18.034) 65.065,18.034 65.743,17.356 M2.5@65.743,16.926
  Top Copper w0.254: U1.43@30.602,21.974 U1.39@32.001,21.974 ; U1.1@39.723,29.223 39.723,29.527 40.033,29.838 C1.1@40.033,31.445 ; C2.2@40.033,33.477 40.033,33.427 40.243,33.218 40.293,33.218 41.504,32.007 v1(41.504,30.455) ; v1(48.387,21.768) 50.125,21.768 C8.1@50.151,21.742 ; v1(53.66,1.336) 54.422,1.336 54.897,1.811 U2.3@54.897,2.74 ; v1(62.742,14.05) 64.135,15.443 65.126,15.443 65.575,14.994 65.575,14.484 M2.2@65.743,14.316 ; J1.S1@71.032,10.084 71.132,9.984 J1.S5@73.482,9.984
  other v1: 54.61,4.318 56.388,4.318 54.61,6.096 56.388,6.096 51.562,25.273 52.705,25.273 51.562,26.035 52.705,26.035
NetC7_1: C7.1 U5.4 | length 3.6
  Top Copper w0.254: U5.4@55.569,18.039 55.702,18.172 56.444,18.172 56.587,18.314 C7.1@59.065,18.314
NetC7_2: C7.2 U5.6 | length 3.6
  Top Copper w0.254: U5.6@55.569,19.939 58.84,19.939 C7.2@59.065,19.714
NetC9_1: C9.1 U8.10 | length 1.6
  Top Copper w0.254: U8.10@52.546,27.178 52.546,28.681 C9.1@52.592,28.727
NetD2_A: D2.A R2.2 | length 2
  Top Copper w0.254: D2.A@29.401,33.452 29.431,33.422 29.431,31.501 R2.2@29.461,31.471
NetD4_A: D4.A R5.2 | length 1.6
  Top Copper w0.254: R5.2@40.846,35.535 D4.A@42.457,35.535
NetD5_A: D5.A R6.2 | length 1.6
  Top Copper w0.254: R6.2@40.846,37.49 42.42,37.49 D5.A@42.445,37.516
NetD6_A: D6.A R12.2 | length 1.8
  Top Copper w0.254: D6.A@51.208,11.125 51.208,12.767 R12.2@51.345,12.903
NetD7_A: D7.A R13.2 | length 1.8
  Top Copper w0.254: D7.A@57.087,11.125 57.087,12.753 R13.2@57.237,12.903
NetD8_A: CHRG.A R15.2 | length 1.9
  Top Copper w0.254: CHRG.A@61.329,25.349 61.329,23.696 R15.2@61.479,23.546
NetD9_A: D9.A R16.2 | length 1.5
  Bottom Copper w0.254: D9.A@68.872,18.136 R16.2@70.369,18.136
NetM2_4: M2.4 R31.1 R33.2 U10.7 | length 6.8
  Top Copper w0.127: U10.7@66.66,19.463 66.696,19.426 66.959,19.426 67.056,19.329 R33.2@68.402,19.329
  Top Copper w0.254: M2.4@66.693,16.926 67.337,16.926 68.402,17.991 R33.2@68.402,19.329 68.388,19.344 R31.1@68.388,20.828
NetM2_6: M2.6 R33.1 | length 8.1
  Top Copper w0.254: M2.6@64.793,16.926 64.793,16.496 65.465,15.824 67.945,15.824 69.802,17.681 R33.1@69.802,19.329
NetMH1_1: MH1.1 R34.2 | length 4.1
  Top Copper w0.254: R34.2@67.843,37.124 67.883,37.084 MH1.1@71.882,37.084
NetMH2_1: MH2.1 R35.2 | length 3.8
  Top Copper w0.254: R35.2@71.792,6.782 71.882,6.691 MH2.1@71.882,3.048
NetMH3_1: MH3.1 R36.2 | length 3.9
  Top Copper w0.254: MH3.1@3.175,3.048 3.316,2.907 R36.2@7.061,2.907
NetMH4_1: MH4.1 R37.2 | length 3.9
  Top Copper w0.254: MH4.1@3.175,37.084 7.022,37.084 R37.2@7.087,37.149
NetQ1_1: Q1.1 R14.2 | length 4.7
  Top Copper w0.254: R14.2@45.593,3.048 45.643,3.098 45.643,6.523 Q1.1@46.476,7.356
NetQ2_1: Q2.1 R18.2 | length 4.6
  Top Copper w0.254: Q2.1@47.764,3.287 47.764,6.677 48.616,7.53 R18.2@48.666,7.53
NetR2_1: R2.1 U1.8 | length 2.3
  Top Copper w0.254: U1.8@30.833,29.223 30.847,29.237 30.847,31.457 R2.1@30.861,31.471
NetR8_1: R8.1 U2.25 | length 20.3
  Top Copper w0.254: R8.1@33.858,6.564 33.858,5.678 34.29,5.247 v1(34.95,5.247) ; v1(51.206,5.385) 51.968,5.385 52.222,5.131 U2.25@53.007,5.131
  Bottom Copper w0.254: v1@34.95,5.385 v1(51.206,5.385)
NetR10_2: R10.2 U2.9 | length 5.7
  Top Copper w0.254: U2.9@57.788,4.131 58.334,4.131 58.903,4.699 61.736,4.699 R10.2@62.814,5.777
NetR11_1: R11.1 U2.26 | length 18.5
  Top Copper w0.254: R11.1@36.5,6.514 36.474,6.488 36.474,4.801 36.906,4.369 v1(38.049,4.369) ; v1(51.206,4.369) 51.968,4.369 52.23,4.631 U2.26@53.007,4.631
  Bottom Copper w0.254: v1(38.049,4.369) v1(51.206,4.369)
NetR21_1: R21.1 U5.3 | length 2.4
  Top Copper w0.254: R21.1@50.657,18.187 50.806,18.039 U5.3@52.959,18.039
NetR24_1: R24.1 U8.6 | length 4.1
  Top Copper w0.254: U8.6@52.946,24.181 52.946,23.711 53.442,23.216 54.61,23.216 55.028,23.633 R24.1@55.028,24.79
NetR25_1: R25.1 R27.2 U8.9 | length 4.3
  Top Copper w0.254: U8.9@52.946,27.178 52.946,27.566 53.219,27.838 54.468,27.838 R25.1@55.028,27.279 ; R25.1@55.028,27.229 R25.1@55.028,27.279 ; R27.2@55.028,28.727 R25.1@55.028,27.279
NetR29_1: R29.1 U10.9 | length 3.4
  Top Copper w0.127: U10.9@66.66,20.263 67.642,20.263 67.716,20.337 67.716,21.605 68.388,22.277 R29.1@68.388,22.327
NetR30_2: R30.2 U10.2 | length 5.2
  Top Copper w0.127: R30.2@61.265,17.769 61.315,17.769 62.012,18.466 63.307,18.466 63.5,18.659 63.5,19.812 63.951,20.263 U10.2@64.76,20.263
NetR32_2: R32.2 U10.4 | length 3.1
  Top Copper w0.127: R32.2@62.763,17.769 63.54,17.769 64.249,18.479 64.249,19.178 64.534,19.463 U10.4@64.76,19.463
RTS: Q1.2 R18.1 U2.24 | length 8.1
  Top Copper w0.254: Q1.2@46.476,9.256 46.576,9.256 46.902,8.93 R18.1@48.712,8.93 ; R18.1@48.666,8.93 48.829,8.767 49.349,8.767 52.484,5.631 U2.24@53.007,5.631
UART1_RX: R8.2 R9.1 U1.34 | length 4.1
  Top Copper w0.254: R8.2@33.858,7.964 33.858,9.358 R9.1@33.923,9.423 33.923,10.697 34.643,11.417 U1.34@34.643,11.722
UART1_TX: R11.2 U1.35 | length 4.1
  Top Copper w0.254: U1.35@35.913,11.722 35.913,11.417 36.5,10.831 R11.2@36.5,7.914
USB_N: D11.2 J1.2 U2.5 | length 28.8
  Top Copper w0.254: U2.5@55.897,2.74 55.897,1.532 56.363,1.067 65.532,1.067 65.71,1.245 65.71,1.6 66.04,1.93 66.573,1.93 66.853,2.21 66.853,2.565 67.056,2.769 67.793,2.769 67.945,2.921 67.945,3.353 68.097,3.505 68.478,3.505 68.743,3.769 D11.2@68.743,5.071 68.682,5.132 v1(68.682,6.467) ; v3(68.834,13.126) 69.284,13.126 69.741,12.669 70.259,12.669 70.294,12.634 J1.2@70.807,12.634
  Bottom Copper w0.254: v1(68.682,6.467) 68.682,7.493 68.047,8.128 68.047,13.119 68.195,13.268 68.625,13.268 68.767,13.126 v3(68.834,13.126)
USB_P: D11.1 J1.3 U2.4 | length 30
  Top Copper w0.254: U2.4@55.389,2.74 55.389,1.322 56.152,0.559 66.269,0.559 67.387,1.677 67.387,2.084 v1(67.412,2.108) ; v1(66.904,6.477) 66.904,5.77 66.906,5.768 66.906,5.134 D11.1@66.843,5.071 66.843,5.021 67.401,4.462 v1(67.401,3.567) ; v3(68.834,13.776) 69.553,13.776 70.01,13.319 70.773,13.319 J1.3@70.807,13.284
  Bottom Copper w0.254: v1(66.904,6.477) 66.904,7.493 67.539,8.128 67.539,13.33 67.985,13.776 v3(68.834,13.776) ; v1(67.401,3.567) 67.401,2.119 v1(67.412,2.108)
USB_RXT: D7.C U2.18 | length 5.1
  Top Copper w0.254: U2.18@55.397,7.521 55.397,8.052 58.198,10.852 58.464,10.852 D7.C@58.737,11.125
USB_TXT: D6.C U2.19 | length 4.4
  Top Copper w0.254: D6.C@52.858,11.125 52.858,10.21 54.897,8.171 U2.19@54.897,7.521
VBUS: D1.A D3.C J1.1
VBUS_IN: R3.2 R7.2 U2.8 | length 5
  Top Copper w0.254: U2.8@57.788,3.631 59.68,3.631 R7.2@59.715,3.596 62.778,3.596 R3.2@62.789,3.607
VCC: C6.2 C8.2 C10.1 D10.C M1.4 M1.7 R21.2 R24.2 U5.5 U8.1 U8.2 U8.3 U8.4 | length 9.1
  Top Copper w0.254: v1(49.403,19.558) 50.628,19.558 R21.2@50.657,19.587 ; U8.3@51.746,24.181 U8.4@52.146,24.181 ; U5.5@55.569,18.989 57.563,18.989 C6.2@57.566,18.992 59.632,18.992 59.944,19.304 59.944,21.717 v2(59.563,22.098)
  other v1: 58.42,24.892 59.944,24.892 58.42,25.908 59.944,25.908 58.42,26.924 59.944,26.924 61.468,26.924 62.992,26.924 58.42,27.94 59.944,27.94 61.468,27.94 62.992,27.94 58.42,28.956 59.944,28.956 61.468,28.956 62.992,28.956 58.42,29.972 62.992,29.972 58.42,30.988 62.992,30.988 65.024,31.496 66.548,31.496 68.072,31.496 58.42,32.004 62.992,32.004 68.072,32.928 58.42,33.02 62.992,33.02 65.024,33.02 66.548,33.02 58.42,34.036 62.992,34.036 65.024,34.036 66.548,34.036 68.072,34.036
  other v2: 48.387,23.368 49.784,23.368 48.387,25.019 49.784,25.019
VCC_BIAS: C12.2 U5.1 U8.5 | length 4.4
  Top Copper w0.254: U8.5@52.546,24.181 52.546,23.501 52.954,23.093 C12.2@52.954,21.732 52.959,21.728 U5.1@52.959,19.939
pads on no net: J1.4 U1.4 U1.5 U1.6 U1.7 U1.9 U1.10 U1.12 U1.13 U1.17 U1.18 U1.19 U1.20 U1.21 U1.22 U1.27 U1.28 U1.29 U1.30 U1.31 U1.32 U1.33 U1.36 U1.37 U2.1 U2.2 U2.10 U2.12 U2.15 U2.16 U2.17 U2.20 U2.21 U2.22 U2.23 U2.27 U8.8 U10.6

## Polygon pours and split planes (outlines as drawn)
GND on Top Copper "GND_L01_P008" (solid, remove dead copper, pour order 8): 0,0 0,40 75,40 75,0
+5V on Top Copper "+5V_L01_P007" (solid, remove dead copper, pour order 7): 64.893,21.209 64.893,20.451 63.493,20.451 63.493,20.168 63.262,20.168 60.503,20.168 60.503,22.885 66.294,22.885 66.294,21.209
+VBAT on Top Copper "+VBAT_L01_P001" (solid, remove dead copper, pour order 1): 66.294,22.885 62.484,22.885 62.484,24.13 64.897,24.13 64.897,30.226 71.374,30.226 71.374,22.987 67.716,22.987 67.716,20.263 66.294,20.263
VBUS on Top Copper "VBUS_L01_P000" (solid, remove dead copper, pour order 0): 72.339,12.243 67.361,12.243 67.361,8.509 72.339,8.509
VCC on Top Copper "VCC_L01_P002" (solid, remove dead copper, pour order 2): 64.897,28.702 63.957,28.702 63.957,30.886 71.018,30.886 71.018,32.309 69.215,32.309 69.215,35.128 57.404,35.128 57.404,25.908 56.159,25.908 56.159,23.749 60.579,23.749 60.579,25.959 64.897,25.959
+5V on Top Copper "+5V_L01_P003" (solid, remove dead copper, pour order 3): 75.006,34.417 71.38,34.417 71.272,34.417 71.272,37.973 71.272,28.702 75.006,28.702
+5V on Top Copper "+5V_L01_P004" (solid, remove dead copper, pour order 4): 67.158,10.033 67.158,12.7 63.754,12.7 63.754,10.033
+3V3 on Top Copper "+3V3_L01_P005" (solid, remove dead copper, pour order 5): 47.574,25.857 50.571,25.857 50.571,26.791 50.565,26.797 57.429,26.797 57.429,35.179 47.574,35.179
VCC on Top Copper "VCC_L01_P006" (solid, remove dead copper, pour order 6): 50.565,24.613 50.571,24.619 50.571,25.857 47.549,25.857 47.549,20.701 52.349,20.701 52.349,24.613
GND on Bottom Copper "GND_L04_P009" (solid, remove dead copper, pour order 9): 0,0 0,40 75,40 75,0
+3V3 on PWR (split plane): 57.275,26.037 47.627,26.037 47.627,29.718 47.618,29.768 47.59,29.81 47.548,29.838 47.498,29.847 40.386,29.847 40.336,29.838 40.294,29.81 40.266,29.768 40.257,29.718 40.257,11.176 40.266,11.126 40.294,11.084 40.336,11.056 40.386,11.047 47.498,11.047 47.548,11.056 47.59,11.084 47.618,11.126 47.627,11.176 47.627,15.111 60.323,15.111 60.323,9.398 60.332,9.348 60.36,9.306 60.402,9.278 60.452,9.269 74.49,9.269 74.49,0.51 0.51,0.51 0.51,39.49 57.275,39.49
+3V3 on PWR (split plane): 47.369,25.908 47.369,15.24 47.369,11.305 40.515,11.305 40.515,29.589 47.369,29.589
+5V on PWR (split plane): 74.49,9.527 60.581,9.527 60.581,22.858 70.612,22.858 70.662,22.867 70.704,22.895 70.732,22.937 70.741,22.987 70.741,39.49 74.49,39.49
VCC on PWR (split plane): 70.483,23.116 60.452,23.116 60.402,23.107 60.36,23.079 60.332,23.037 60.323,22.987 60.323,15.369 47.627,15.369 47.627,25.779 57.404,25.779 57.454,25.788 57.496,25.816 57.524,25.858 57.533,25.908 57.533,39.49 70.483,39.49
GND on GND (split plane): 74.49,0.51 0.51,0.51 0.51,39.49 74.49,39.49

## Other copper
PWR (plane layer: these items are gaps in the copper):
  lines w0.254: 60.452,15.24 47.498,15.24 ; 47.498,15.24 47.498,25.908 ; 47.498,15.24 47.498,11.176 40.386,11.176 40.386,29.718 47.498,29.718 47.498,25.908 ; 47.498,25.908 57.404,25.908 57.404,40.132 70.612,40.132 ; 70.612,40.132 74.955,40.132 74.93,40.107 74.93,9.525 74.803,9.398 67.691,9.398 60.452,9.398 60.452,22.987 70.612,22.987 70.612,40.132

## Silkscreen, mask and mechanical layers (free items; w line width, h text height)
Top Overlay:
  text "3V3" at 45.16,37.082 h0.8
  text "5V" at 45.185,35.101 h0.8
  text "TXT" at 50.141,11.174 h0.8 r90
  text "RXT" at 56.059,11.174 h0.8 r90
Bottom Overlay:
  text "CAL" at 27.551,35.044 h1 r90
  text "GND" at 34.155,35.044 h1 r90
  text "ENABLE" at 36.695,35.044 h1 r90
  text "GND" at 30.066,35.039 h1 r90
  text "FSO1" at 11.076,31.088 h1
  text "3V3" at 11.076,28.548 h1
  text "GND" at 67.429,26.932 h1
  text "3V3" at 11.076,26.008 h1
  text "VBAT" at 67.429,24.9 h1
  text "FSO2" at 11.076,23.468 h1
  text "3V3" at 11.076,20.928 h1
  text "FSO3" at 11.076,18.388 h1
  text "3V3" at 11.076,15.848 h1
  text "3V3" at 11.076,13.308 h1
  text "FSO4" at 11.076,10.768 h1
  text "BOOT" at 27.459,8.917 h1 r90
  text "FSO5" at 11.076,8.228 h1
  text "GND" at 29.999,7.901 h1 r90
Board Shape:
  the board outline again, w0.1

## Dimensions
-0.102,0 to 0,40.005 on Dimensions
0,0 to 75.006,0 on Dimensions

## Text inside footprints (layer, text, board x,y; h text height)
U1: Top 3D Body "*" at 39.088,28.156 h1.27 r270